# EAGLE board SparkFun_Photon_Weather_Shield_Panel_v10 (EAGLE 7.3.0), part 1 of 2
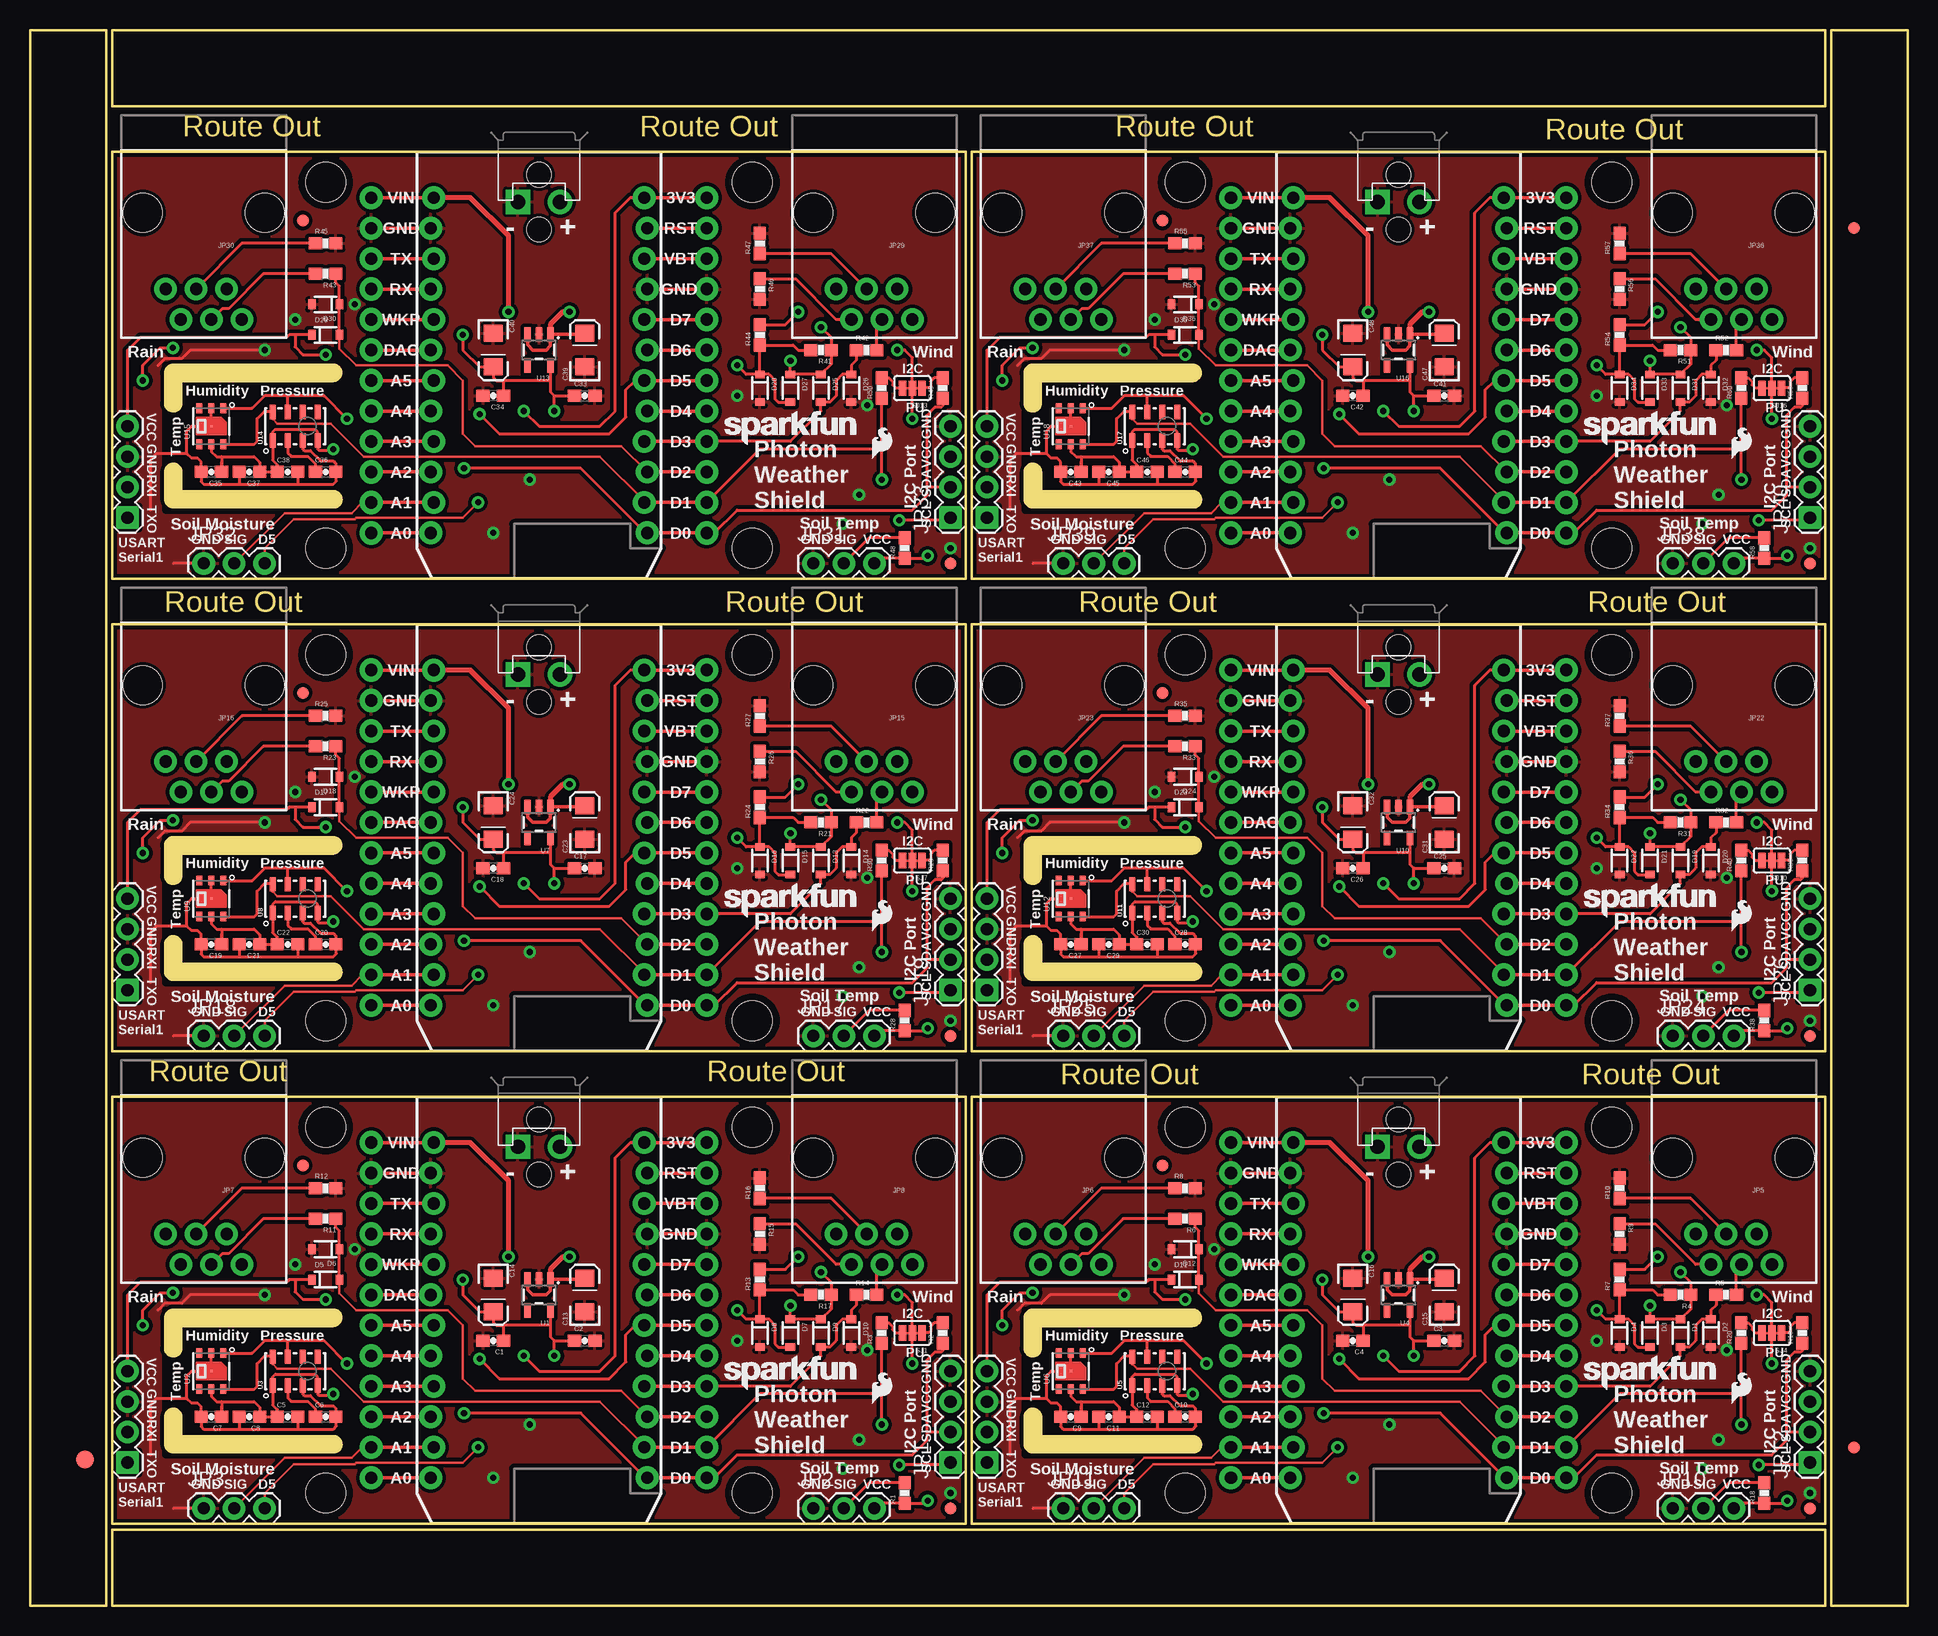
[diagram p0: board, top side]
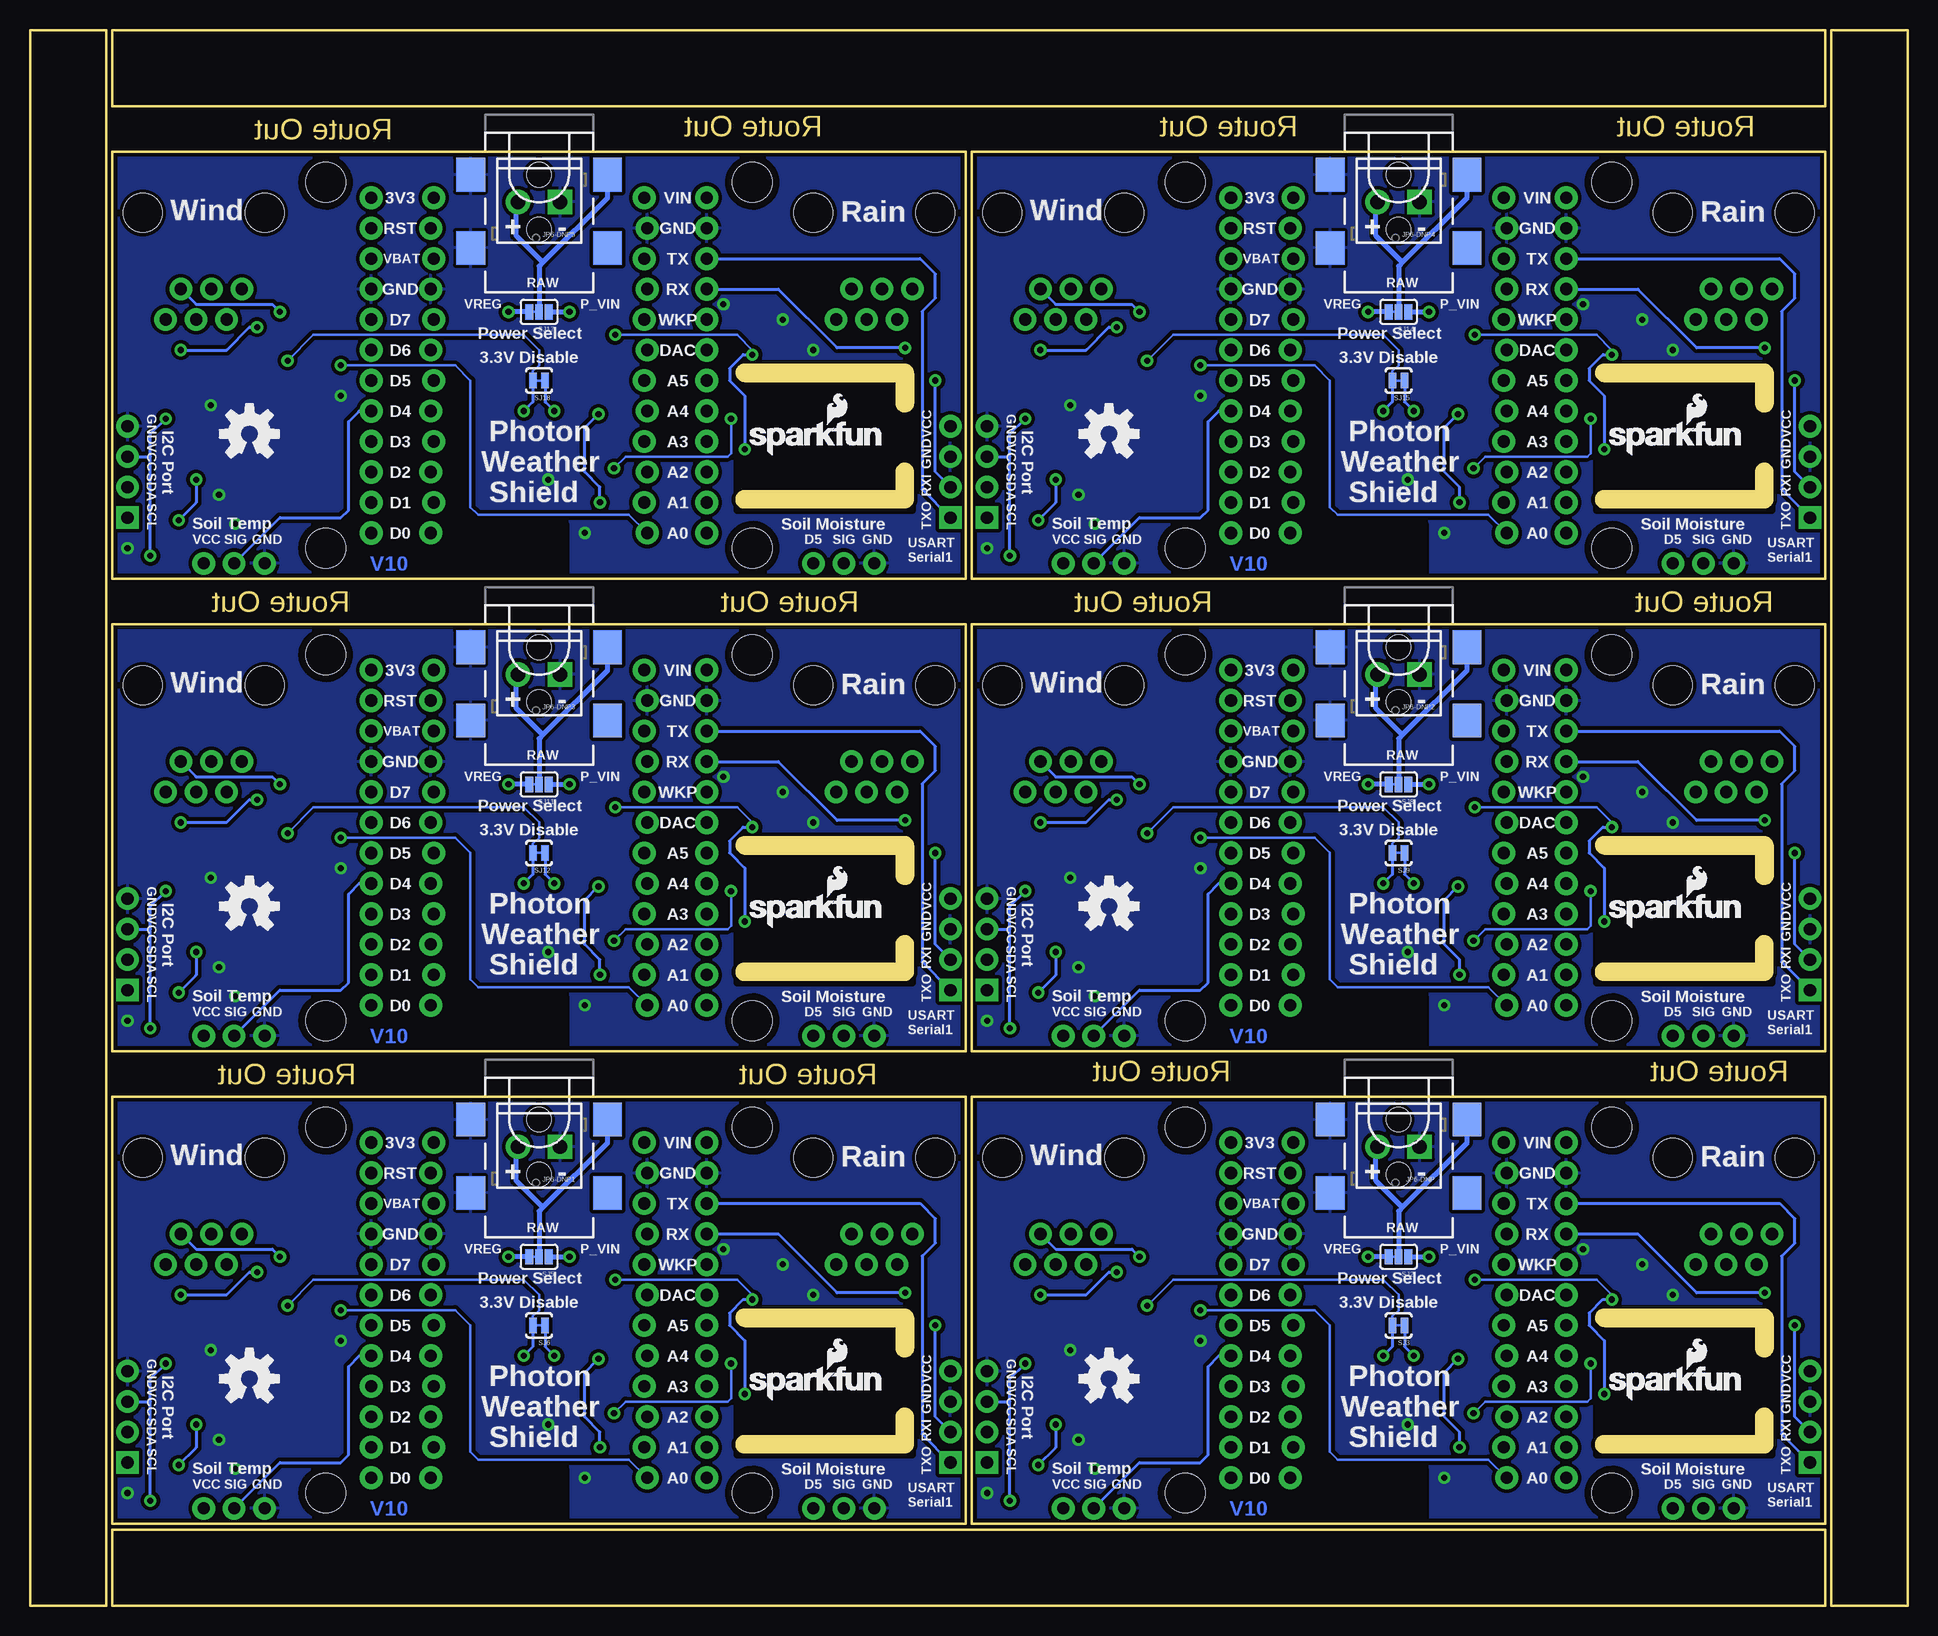
[diagram p1: board, bottom side, seen from below]

Size 156.46 x 131.32 mm. Coordinates in mm from the lower left corner, seen from the top.
Outline: 6.86,6.86 6.86,42.42 77.98,42.42 77.98,6.86 6.86,6.86
Outline: 11.25,23.95 11.25,21.49 arc90 11.94,20.8 arc90 12.6,21.46 12.6,23.32 25.22,23.32 arc90 25.93,24.03 arc90 25.3,24.66 11.96,24.66 arc90 11.25,23.95
Outline: 11.28,13.51 11.28,15.72 arc-90 11.96,16.41 arc-90 12.62,15.72 12.62,14.15 25.25,14.15 arc-90 25.96,13.44 arc-90 25.32,12.8 11.99,12.8 arc-90 11.28,13.51
Outline: 78.49,6.86 78.49,42.42 149.61,42.42 149.61,6.86 78.49,6.86
Outline: 82.88,23.95 82.88,21.49 arc90 83.57,20.8 arc90 84.23,21.46 84.23,23.32 96.85,23.32 arc90 97.56,24.03 arc90 96.93,24.66 83.59,24.66 arc90 82.88,23.95
Outline: 82.91,13.51 82.91,15.72 arc-90 83.59,16.41 arc-90 84.25,15.72 84.25,14.15 96.88,14.15 arc-90 97.59,13.44 arc-90 96.95,12.8 83.62,12.8 arc-90 82.91,13.51
Outline: 6.86,46.23 6.86,81.79 77.98,81.79 77.98,46.23 6.86,46.23
Outline: 11.25,63.32 11.25,60.86 arc90 11.94,60.17 arc90 12.6,60.83 12.6,62.69 25.22,62.69 arc90 25.93,63.4 arc90 25.3,64.03 11.96,64.03 arc90 11.25,63.32
Outline: 11.28,52.88 11.28,55.09 arc-90 11.96,55.78 arc-90 12.62,55.09 12.62,53.52 25.25,53.52 arc-90 25.96,52.81 arc-90 25.32,52.17 11.99,52.17 arc-90 11.28,52.88
Outline: 78.49,46.23 78.49,81.79 149.61,81.79 149.61,46.23 78.49,46.23
Outline: 82.88,63.32 82.88,60.86 arc90 83.57,60.17 arc90 84.23,60.83 84.23,62.69 96.85,62.69 arc90 97.56,63.4 arc90 96.93,64.03 83.59,64.03 arc90 82.88,63.32
Outline: 82.91,52.88 82.91,55.09 arc-90 83.59,55.78 arc-90 84.25,55.09 84.25,53.52 96.88,53.52 arc-90 97.59,52.81 arc-90 96.95,52.17 83.62,52.17 arc-90 82.91,52.88
Outline: 6.86,85.6 6.86,121.16 77.98,121.16 77.98,85.6 6.86,85.6
Outline: 11.25,102.69 11.25,100.23 arc90 11.94,99.54 arc90 12.6,100.2 12.6,102.06 25.22,102.06 arc90 25.93,102.77 arc90 25.3,103.4 11.96,103.4 arc90 11.25,102.69
Outline: 11.28,92.25 11.28,94.46 arc-90 11.96,95.15 arc-90 12.62,94.46 12.62,92.89 25.25,92.89 arc-90 25.96,92.18 arc-90 25.32,91.54 11.99,91.54 arc-90 11.28,92.25
Outline: 78.49,85.6 78.49,121.16 149.61,121.16 149.61,85.6 78.49,85.6
Outline: 82.88,102.69 82.88,100.23 arc90 83.57,99.54 arc90 84.23,100.2 84.23,102.06 96.85,102.06 arc90 97.56,102.77 arc90 96.93,103.4 83.59,103.4 arc90 82.88,102.69
Outline: 82.91,92.25 82.91,94.46 arc-90 83.59,95.15 arc-90 84.25,94.46 84.25,92.89 96.88,92.89 arc-90 97.59,92.18 arc-90 96.95,91.54 83.62,91.54 arc-90 82.91,92.25
Outline: 6.86,124.97 149.61,124.97 149.61,131.32 6.86,131.32 6.86,124.97
Outline: 150.11,131.32 150.11,0 156.46,0 156.46,131.32 150.11,131.32
Outline: 149.61,6.35 6.86,6.35 6.86,0 149.61,0 149.61,6.35
Outline: 6.35,0 6.35,131.32 0,131.32 0,0 6.35,0
Copper layers (1*16): Top 0.035mm / dielectric 1.5mm / Bottom 0.035mm
Design rules "SparkFun-2-layer": minimum track width 7mil, minimum drill 15mil, track to track 8mil, track to pad 8mil, pad to pad 8mil, via to via 8mil, smd to smd 8mil, copper to edge 8mil, drill to drill 8mil, minimum pad ring 12mil, minimum via ring 10mil, stop-mask expansion 4mil, vias tented up to drill 20mil, thermal gap 10mil
Net classes: 0 Default: width 0.203 mm; 1 vcc: width 0.203 mm
tRestrict: area 11.3,12.6 to 25.9,24.6; area 82.9,12.6 to 97.5,24.6; area 11.3,51.9 to 25.9,64; area 82.9,51.9 to 97.5,64; area 11.3,91.3 to 25.9,103.4; area 82.9,91.3 to 97.5,103.4
bRestrict: area 11.3,12.6 to 25.9,24.6; area 82.9,12.6 to 97.5,24.6; area 11.3,51.9 to 25.9,64; area 82.9,51.9 to 97.5,64; area 11.3,91.3 to 25.9,103.4; area 82.9,91.3 to 97.5,103.4
Milling: 24 lines

## Footprints (pad centres in the part's own frame; a part is rotated, then mirrored left to right if it is on the bottom)
0603-CAP = smd 1.1 x 1: 1 -0.85,0; 2 0.85,0
EIA3216 = smd 1.4 x 1.6: A 1.4,0; C -1.4,0
SOD-323 = smd 0.63 x 0.83: A 1.15,0; C -1.15,0
FIDUCIAL-1.5X3 = smd 1.5 x 1.5: 1 0,0
FIDUCIAL-1X2 = smd 1 x 1: 1 0,0
1X04 = drill 1.016 pad 1.88 square: 1 0,0 | drill 1.016 pad 1.88: 2 2.54,0; 3 5.08,0; 4 7.62,0
1X03 = drill 1.016 pad 1.88: 1 0,0; 2 2.54,0; 3 5.08,0
RJ11-6 = drill 1.016 pad 1.88: 1 -3.175,8.89; 2 -1.905,6.35; 3 -0.635,8.89; 4 0.635,6.35; 5 1.905,8.89; 6 3.175,6.35 | hole 3.251: -5.08,0; 5.08,0
POWER_JACK_SMD = smd 2.8 x 2.4: GND 0,-5.7; P$4 6.1,-5.7; VIN0 0,5.7; VIN1 6.1,5.7 | hole 2.032: 0,0; 4.572,0
SCREWTERMINAL-3.5MM-2 = drill 1.2 pad 2.032 square: 1 0,0 | drill 1.2 pad 2.032: 2 3.5,0
SPARK_PHOTON_TEMPLATE_WIDE_LOCKING = drill 1.016 pad 1.905: 1 1.397,31.75; 2 1.143,29.21; 3 1.397,26.67; 4 1.143,24.13; 5 1.397,21.59; 6 1.143,19.05; 7 1.397,16.51; 8 1.143,13.97; 9 1.397,11.43; 10 1.143,8.89; 11 1.397,6.35; 12 1.143,3.81; 13 19.177,3.81; 14 18.923,6.35; 15 19.177,8.89; 16 18.923,11.43; 17 19.177,13.97; 18 18.923,16.51; 19 19.177,19.05; 20 18.923,21.59; 21 19.177,24.13; 22 18.923,26.67; 23 19.177,29.21; 24 18.923,31.75 | drill 1.016 pad 1.93: 3V3 24.13,31.75; A0 -3.81,3.81; A1 -3.81,6.35; A2 -3.81,8.89; A3 -3.81,11.43; A4 -3.81,13.97; A5 -3.81,16.51; D0 24.13,3.81; D1 24.13,6.35; D2 24.13,8.89; D3 24.13,11.43; D4 24.13,13.97; D5 24.13,16.51; D6 24.13,19.05; D7 24.13,21.59; DAC -3.81,19.05; GND@0 -3.81,29.21; GND@2 24.13,24.13; RST 24.13,29.21; RX -3.81,24.13; TX -3.81,26.67; VBAT 24.13,26.67; VIN -3.81,31.75; WKP -3.81,21.59 | hole 3.302: -7.62,33.02; 27.94,33.02; -7.62,2.54; 27.94,2.54
0603-RES = smd 1.1 x 1: 1 -0.85,0; 2 0.85,0
PAD-JUMPER-3-3OF3_NC_BY_TRACE_YES_SILK_FULL_BOX = smd 0.635 x 1.27: 1 -0.813,0; 2 0,0; 3 0.813,0
PAD-JUMPER-3-2OF3_NC_BY_TRACE_YES_SILK_FULL_BOX = smd 0.635 x 1.27: 1 -0.813,0; 2 0,0; 3 0.813,0
PAD-JUMPER-2-NC_BY_TRACE_YES_SILK = smd 0.635 x 1.27: 1 -0.508,0; 2 0.508,0
SOT23-5 = smd 0.55 x 1.2: 1 -0.95,-1.3; 2 0,-1.3; 3 0.95,-1.3; 4 0.95,1.3; 5 -0.95,1.3
HTU21D = smd 0.2 x 0.2: 7 0,0 | smd 0.8 x 0.5: DATA 1.5,-1; GND 1.5,0; NC@1 -1.5,1; NC@6 1.5,1; SCK -1.5,-1; VDD -1.5,0
LGA8 = smd 1.2 x 0.5: 1 -1.2,1.875; 2 -1.2,0.625; 3 -1.2,-0.625; 4 -1.2,-1.875; 5 1.2,-1.875; 6 1.2,-0.625; 7 1.2,0.625; 8 1.2,1.875

## Placement (x,y rotation side)
C1  1.0uF  [0603-CAP]  38.61,22.1 180 top
C2  0.1uF  [0603-CAP]  46.23,22.1 0 top
C3  0.1uF  [0603-CAP]  117.86,22.1 0 top
C4  1.0uF  [0603-CAP]  110.24,22.1 180 top
C5  0.1uF  [0603-CAP]  21.46,15.75 0 top
C6  0.1uF  [0603-CAP]  24.64,15.75 0 top
C7  0.1uF  [0603-CAP]  15.11,15.75 180 top
C8  1.0uF  [0603-CAP]  18.29,15.75 180 top
C9  0.1uF  [0603-CAP]  86.74,15.75 180 top
C10  0.1uF  [0603-CAP]  96.27,15.75 0 top
C11  1.0uF  [0603-CAP]  89.92,15.75 180 top
C12  0.1uF  [0603-CAP]  93.09,15.75 0 top
C13  10uF  [EIA3216]  46.23,25.91 90 top
C14  10uF  [EIA3216]  38.61,25.91 270 top
C15  10uF  [EIA3216]  117.86,25.91 90 top
C16  10uF  [EIA3216]  110.24,25.91 270 top
C17  0.1uF  [0603-CAP]  46.23,61.47 0 top
C18  1.0uF  [0603-CAP]  38.61,61.47 180 top
C19  0.1uF  [0603-CAP]  15.11,55.12 180 top
C20  0.1uF  [0603-CAP]  24.64,55.12 0 top
C21  1.0uF  [0603-CAP]  18.29,55.12 180 top
C22  0.1uF  [0603-CAP]  21.46,55.12 0 top
C23  10uF  [EIA3216]  46.23,65.28 90 top
C24  10uF  [EIA3216]  38.61,65.28 270 top
C25  0.1uF  [0603-CAP]  117.86,61.47 0 top
C26  1.0uF  [0603-CAP]  110.24,61.47 180 top
C27  0.1uF  [0603-CAP]  86.74,55.12 180 top
C28  0.1uF  [0603-CAP]  96.27,55.12 0 top
C29  1.0uF  [0603-CAP]  89.92,55.12 180 top
C30  0.1uF  [0603-CAP]  93.09,55.12 0 top
C31  10uF  [EIA3216]  117.86,65.28 90 top
C32  10uF  [EIA3216]  110.24,65.28 270 top
C33  0.1uF  [0603-CAP]  46.23,100.84 0 top
C34  1.0uF  [0603-CAP]  38.61,100.84 180 top
C35  0.1uF  [0603-CAP]  15.11,94.49 180 top
C36  0.1uF  [0603-CAP]  24.64,94.49 0 top
C37  1.0uF  [0603-CAP]  18.29,94.49 180 top
C38  0.1uF  [0603-CAP]  21.46,94.49 0 top
C39  10uF  [EIA3216]  46.23,104.65 90 top
C40  10uF  [EIA3216]  38.61,104.65 270 top
C41  0.1uF  [0603-CAP]  117.86,100.84 0 top
C42  1.0uF  [0603-CAP]  110.24,100.84 180 top
C43  0.1uF  [0603-CAP]  86.74,94.49 180 top
C44  0.1uF  [0603-CAP]  96.27,94.49 0 top
C45  1.0uF  [0603-CAP]  89.92,94.49 180 top
C46  0.1uF  [0603-CAP]  93.09,94.49 0 top
C47  10uF  [EIA3216]  117.86,104.65 90 top
C48  10uF  [EIA3216]  110.24,104.65 270 top
D1  250mA/100V  [SOD-323]  137.54,22.73 270 top
D2  250mA/100V  [SOD-323]  140.08,22.73 270 top
D3  250mA/100V  [SOD-323]  135,22.73 270 top
D4  250mA/100V  [SOD-323]  132.46,22.73 270 top
D5  250mA/100V  [SOD-323]  24.64,27.18 0 top
D6  250mA/100V  [SOD-323]  24.64,29.72 180 top
D7  250mA/100V  [SOD-323]  63.37,22.73 270 top
D8  250mA/100V  [SOD-323]  60.83,22.73 270 top
D9  250mA/100V  [SOD-323]  65.91,22.73 270 top
D10  250mA/100V  [SOD-323]  68.45,22.73 270 top
D11  250mA/100V  [SOD-323]  96.27,27.18 0 top
D12  250mA/100V  [SOD-323]  96.27,29.72 180 top
D13  250mA/100V  [SOD-323]  65.91,62.1 270 top
D14  250mA/100V  [SOD-323]  68.45,62.1 270 top
D15  250mA/100V  [SOD-323]  63.37,62.1 270 top
D16  250mA/100V  [SOD-323]  60.83,62.1 270 top
D17  250mA/100V  [SOD-323]  24.64,66.55 0 top
D18  250mA/100V  [SOD-323]  24.64,69.09 180 top
D19  250mA/100V  [SOD-323]  137.54,62.1 270 top
D20  250mA/100V  [SOD-323]  140.08,62.1 270 top
D21  250mA/100V  [SOD-323]  135,62.1 270 top
D22  250mA/100V  [SOD-323]  132.46,62.1 270 top
D23  250mA/100V  [SOD-323]  96.27,66.55 0 top
D24  250mA/100V  [SOD-323]  96.27,69.09 180 top
D25  250mA/100V  [SOD-323]  65.91,101.47 270 top
D26  250mA/100V  [SOD-323]  68.45,101.47 270 top
D27  250mA/100V  [SOD-323]  63.37,101.47 270 top
D28  250mA/100V  [SOD-323]  60.83,101.47 270 top
D29  250mA/100V  [SOD-323]  24.64,105.92 0 top
D30  250mA/100V  [SOD-323]  24.64,108.46 180 top
D31  250mA/100V  [SOD-323]  137.54,101.47 270 top
D32  250mA/100V  [SOD-323]  140.08,101.47 270 top
D33  250mA/100V  [SOD-323]  135,101.47 270 top
D34  250mA/100V  [SOD-323]  132.46,101.47 270 top
D35  250mA/100V  [SOD-323]  96.27,105.92 0 top
D36  250mA/100V  [SOD-323]  96.27,108.46 180 top
E$1  [FIDUCIAL-1.5X3]  4.57,12.19 0 top
E$3  [FIDUCIAL-1X2]  152.02,114.81 180 top
E$4  [FIDUCIAL-1X2]  152.02,13.21 0 top
FID1  FIDUCIAL1X2  [FIDUCIAL-1X2]  76.71,8.13 0 top
FID2  FIDUCIAL1X2  [FIDUCIAL-1X2]  22.73,36.7 0 top
FID3  FIDUCIAL1X2  [FIDUCIAL-1X2]  148.34,8.13 0 top
FID4  FIDUCIAL1X2  [FIDUCIAL-1X2]  94.36,36.7 0 top
FID5  FIDUCIAL1X2  [FIDUCIAL-1X2]  76.71,47.5 0 top
FID6  FIDUCIAL1X2  [FIDUCIAL-1X2]  22.73,76.07 0 top
FID7  FIDUCIAL1X2  [FIDUCIAL-1X2]  148.34,47.5 0 top
FID8  FIDUCIAL1X2  [FIDUCIAL-1X2]  94.36,76.07 0 top
FID9  FIDUCIAL1X2  [FIDUCIAL-1X2]  76.71,86.87 0 top
FID10  FIDUCIAL1X2  [FIDUCIAL-1X2]  22.73,115.44 0 top
FID11  FIDUCIAL1X2  [FIDUCIAL-1X2]  148.34,86.87 0 top
FID12  FIDUCIAL1X2  [FIDUCIAL-1X2]  94.36,115.44 0 top
JP1  I2C Port  [1X04]  76.71,11.94 90 top
JP2  Soil/Water Temp  [1X03]  65.28,8.13 0 top
JP3  Soil Moisture  [1X03]  14.48,8.13 0 top
JP4  Serial1 Port  [1X04]  8.13,11.94 90 top
JP5  RJ11  [RJ11-6]  141.99,37.34 180 top
JP5-DNP  5.5x2.1mm Barrel  [POWER_JACK_SMD]  42.42,40.51 270 bottom
JP5-DNP1  5.5x2.1mm Barrel  [POWER_JACK_SMD]  114.05,40.51 270 bottom
JP5-DNP2  5.5x2.1mm Barrel  [POWER_JACK_SMD]  42.42,79.88 270 bottom
JP5-DNP3  5.5x2.1mm Barrel  [POWER_JACK_SMD]  114.05,79.88 270 bottom
JP5-DNP4  5.5x2.1mm Barrel  [POWER_JACK_SMD]  42.42,119.25 270 bottom
JP5-DNP5  5.5x2.1mm Barrel  [POWER_JACK_SMD]  114.05,119.25 270 bottom
JP6  RJ11  [RJ11-6]  86.11,37.34 180 top
JP6-DNP  [SCREWTERMINAL-3.5MM-2]  40.67,38.25 180 bottom
JP6-DNP1  [SCREWTERMINAL-3.5MM-2]  112.29,38.25 180 bottom
JP6-DNP2  [SCREWTERMINAL-3.5MM-2]  40.67,77.62 180 bottom
JP6-DNP3  [SCREWTERMINAL-3.5MM-2]  112.29,77.62 180 bottom
JP6-DNP4  [SCREWTERMINAL-3.5MM-2]  40.67,116.99 180 bottom
JP6-DNP5  [SCREWTERMINAL-3.5MM-2]  112.29,116.99 180 bottom
JP7  RJ11  [RJ11-6]  14.48,37.34 180 top
JP8  RJ11  [RJ11-6]  70.36,37.34 180 top
JP9  PHOTON_TEMPLATE_WIDE_LOCKING  [SPARK_PHOTON_TEMPLATE_WIDE_LOCKING]  32.26,6.86 0 top
JP10  Soil/Water Temp  [1X03]  136.91,8.13 0 top
JP11  Soil Moisture  [1X03]  86.11,8.13 0 top
JP12  I2C Port  [1X04]  148.34,11.94 90 top
JP13  Serial1 Port  [1X04]  79.76,11.94 90 top
JP14  PHOTON_TEMPLATE_WIDE_LOCKING  [SPARK_PHOTON_TEMPLATE_WIDE_LOCKING]  103.89,6.86 0 top
JP15  RJ11  [RJ11-6]  70.36,76.71 180 top
JP16  RJ11  [RJ11-6]  14.48,76.71 180 top
JP17  Soil/Water Temp  [1X03]  65.28,47.5 0 top
JP18  Soil Moisture  [1X03]  14.48,47.5 0 top
JP19  I2C Port  [1X04]  76.71,51.31 90 top
JP20  Serial1 Port  [1X04]  8.13,51.31 90 top
JP21  PHOTON_TEMPLATE_WIDE_LOCKING  [SPARK_PHOTON_TEMPLATE_WIDE_LOCKING]  32.26,46.23 0 top
JP22  RJ11  [RJ11-6]  141.99,76.71 180 top
JP23  RJ11  [RJ11-6]  86.11,76.71 180 top
JP24  Soil/Water Temp  [1X03]  136.91,47.5 0 top
JP25  Soil Moisture  [1X03]  86.11,47.5 0 top
JP26  I2C Port  [1X04]  148.34,51.31 90 top
JP27  Serial1 Port  [1X04]  79.76,51.31 90 top
JP28  PHOTON_TEMPLATE_WIDE_LOCKING  [SPARK_PHOTON_TEMPLATE_WIDE_LOCKING]  103.89,46.23 0 top
JP29  RJ11  [RJ11-6]  70.36,116.08 180 top
JP30  RJ11  [RJ11-6]  14.48,116.08 180 top
JP31  Soil/Water Temp  [1X03]  65.28,86.87 0 top
JP32  Soil Moisture  [1X03]  14.48,86.87 0 top
JP33  I2C Port  [1X04]  76.71,90.68 90 top
JP34  Serial1 Port  [1X04]  8.13,90.68 90 top
JP35  PHOTON_TEMPLATE_WIDE_LOCKING  [SPARK_PHOTON_TEMPLATE_WIDE_LOCKING]  32.26,85.6 0 top
JP36  RJ11  [RJ11-6]  141.99,116.08 180 top
JP37  RJ11  [RJ11-6]  86.11,116.08 180 top
JP38  Soil/Water Temp  [1X03]  136.91,86.87 0 top
JP39  Soil Moisture  [1X03]  86.11,86.87 0 top
JP40  I2C Port  [1X04]  148.34,90.68 90 top
JP41  Serial1 Port  [1X04]  79.76,90.68 90 top
JP42  PHOTON_TEMPLATE_WIDE_LOCKING  [SPARK_PHOTON_TEMPLATE_WIDE_LOCKING]  103.89,85.6 0 top
LOGO1  OSHW-LOGOM  [OSHW-LOGO-M]  66.55,18.92 0 bottom
LOGO2  SFE_LOGO_NAME.1_INCH  [SFE_LOGO_NAME_.1]  57.4,17.53 0 top
LOGO3  OSHW-LOGOM  [OSHW-LOGO-M]  138.18,18.92 0 bottom
LOGO4  SFE_LOGO_NAME.1_INCH  [SFE_LOGO_NAME_.1]  129.03,17.53 0 top
LOGO5  OSHW-LOGOM  [OSHW-LOGO-M]  66.55,58.29 0 bottom
LOGO6  SFE_LOGO_NAME.1_INCH  [SFE_LOGO_NAME_.1]  57.4,56.9 0 top
LOGO7  OSHW-LOGOM  [OSHW-LOGO-M]  138.18,58.29 0 bottom
LOGO8  SFE_LOGO_NAME.1_INCH  [SFE_LOGO_NAME_.1]  129.03,56.9 0 top
LOGO9  OSHW-LOGOM  [OSHW-LOGO-M]  66.55,97.66 0 bottom
LOGO10  SFE_LOGO_NAME.1_INCH  [SFE_LOGO_NAME_.1]  57.4,96.27 0 top
LOGO11  OSHW-LOGOM  [OSHW-LOGO-M]  138.18,97.66 0 bottom
LOGO12  SFE_LOGO_NAME.1_INCH  [SFE_LOGO_NAME_.1]  129.03,96.27 0 top
R1  4.7K  [0603-RES]  72.9,9.4 90 top
R2  10K  [0603-RES]  76.07,22.73 90 top
R3  10K  [0603-RES]  70.99,22.73 90 top
R4  4.7K  [0603-RES]  137.54,25.91 180 top
R5  1K  [0603-RES]  141.35,25.91 0 top
R6  1K  [0603-RES]  96.27,32.26 180 top
R7  1K  [0603-RES]  132.46,27.18 90 top
R8  1K  [0603-RES]  96.27,34.8 0 top
R9  1K  [0603-RES]  132.46,30.99 270 top
R10  1K  [0603-RES]  132.46,34.8 90 top
R11  1K  [0603-RES]  24.64,32.26 180 top
R12  1K  [0603-RES]  24.64,34.8 0 top
R13  1K  [0603-RES]  60.83,27.18 90 top
R14  1K  [0603-RES]  69.72,25.91 0 top
R15  1K  [0603-RES]  60.83,30.99 270 top
R16  1K  [0603-RES]  60.83,34.8 90 top
R17  4.7K  [0603-RES]  65.91,25.91 180 top
R18  4.7K  [0603-RES]  144.53,9.4 90 top
R19  10K  [0603-RES]  147.7,22.73 90 top
R20  10K  [0603-RES]  142.62,22.73 90 top
R21  4.7K  [0603-RES]  65.91,65.28 180 top
R22  1K  [0603-RES]  69.72,65.28 0 top
R23  1K  [0603-RES]  24.64,71.63 180 top
R24  1K  [0603-RES]  60.83,66.55 90 top
R25  1K  [0603-RES]  24.64,74.17 0 top
R26  1K  [0603-RES]  60.83,70.36 270 top
R27  1K  [0603-RES]  60.83,74.17 90 top
R28  4.7K  [0603-RES]  72.9,48.77 90 top
R29  10K  [0603-RES]  76.07,62.1 90 top
R30  10K  [0603-RES]  70.99,62.1 90 top
R31  4.7K  [0603-RES]  137.54,65.28 180 top
R32  1K  [0603-RES]  141.35,65.28 0 top
R33  1K  [0603-RES]  96.27,71.63 180 top
R34  1K  [0603-RES]  132.46,66.55 90 top
R35  1K  [0603-RES]  96.27,74.17 0 top
R36  1K  [0603-RES]  132.46,70.36 270 top
R37  1K  [0603-RES]  132.46,74.17 90 top
R38  4.7K  [0603-RES]  144.53,48.77 90 top
R39  10K  [0603-RES]  147.7,62.1 90 top
R40  10K  [0603-RES]  142.62,62.1 90 top
R41  4.7K  [0603-RES]  65.91,104.65 180 top
R42  1K  [0603-RES]  69.72,104.65 0 top
R43  1K  [0603-RES]  24.64,111 180 top
R44  1K  [0603-RES]  60.83,105.92 90 top
R45  1K  [0603-RES]  24.64,113.54 0 top
R46  1K  [0603-RES]  60.83,109.73 270 top
R47  1K  [0603-RES]  60.83,113.54 90 top
R48  4.7K  [0603-RES]  72.9,88.14 90 top
R49  10K  [0603-RES]  76.07,101.47 90 top
R50  10K  [0603-RES]  70.99,101.47 90 top
R51  4.7K  [0603-RES]  137.54,104.65 180 top
R52  1K  [0603-RES]  141.35,104.65 0 top
R53  1K  [0603-RES]  96.27,111 180 top
R54  1K  [0603-RES]  132.46,105.92 90 top
R55  1K  [0603-RES]  96.27,113.54 0 top
R56  1K  [0603-RES]  132.46,109.73 270 top
R57  1K  [0603-RES]  132.46,113.54 90 top
R58  4.7K  [0603-RES]  144.53,88.14 90 top
R59  10K  [0603-RES]  147.7,101.47 90 top
R60  10K  [0603-RES]  142.62,101.47 90 top
SJ1  [PAD-JUMPER-3-3OF3_NC_BY_TRACE_YES_SILK_FULL_BOX]  73.53,22.73 180 top
SJ2  [PAD-JUMPER-3-2OF3_NC_BY_TRACE_YES_SILK_FULL_BOX]  42.42,29.08 180 bottom
SJ3  [PAD-JUMPER-2-NC_BY_TRACE_YES_SILK]  42.42,23.37 180 bottom
SJ4  [PAD-JUMPER-3-3OF3_NC_BY_TRACE_YES_SILK_FULL_BOX]  145.16,22.73 180 top
SJ5  [PAD-JUMPER-3-2OF3_NC_BY_TRACE_YES_SILK_FULL_BOX]  114.05,29.08 180 bottom
SJ6  [PAD-JUMPER-2-NC_BY_TRACE_YES_SILK]  114.05,23.37 180 bottom
SJ7  [PAD-JUMPER-3-3OF3_NC_BY_TRACE_YES_SILK_FULL_BOX]  73.53,62.1 180 top
SJ8  [PAD-JUMPER-3-2OF3_NC_BY_TRACE_YES_SILK_FULL_BOX]  42.42,68.45 180 bottom
SJ9  [PAD-JUMPER-2-NC_BY_TRACE_YES_SILK]  42.42,62.74 180 bottom
SJ10  [PAD-JUMPER-3-3OF3_NC_BY_TRACE_YES_SILK_FULL_BOX]  145.16,62.1 180 top
SJ11  [PAD-JUMPER-3-2OF3_NC_BY_TRACE_YES_SILK_FULL_BOX]  114.05,68.45 180 bottom
SJ12  [PAD-JUMPER-2-NC_BY_TRACE_YES_SILK]  114.05,62.74 180 bottom
SJ13  [PAD-JUMPER-3-3OF3_NC_BY_TRACE_YES_SILK_FULL_BOX]  73.53,101.47 180 top
SJ14  [PAD-JUMPER-3-2OF3_NC_BY_TRACE_YES_SILK_FULL_BOX]  42.42,107.82 180 bottom
SJ15  [PAD-JUMPER-2-NC_BY_TRACE_YES_SILK]  42.42,102.11 180 bottom
SJ16  [PAD-JUMPER-3-3OF3_NC_BY_TRACE_YES_SILK_FULL_BOX]  145.16,101.47 180 top
SJ17  [PAD-JUMPER-3-2OF3_NC_BY_TRACE_YES_SILK_FULL_BOX]  114.05,107.82 180 bottom
SJ18  [PAD-JUMPER-2-NC_BY_TRACE_YES_SILK]  114.05,102.11 180 bottom
U1  3.3V MIC5219  [SOT23-5]  42.42,25.91 180 top
U2  HTU21D  [HTU21D]  15.11,19.56 90 top
U3  MPL3115A2LGA8  [LGA8]  22.1,19.56 90 top
U4  3.3V MIC5219  [SOT23-5]  114.05,25.91 180 top
U5  MPL3115A2LGA8  [LGA8]  93.73,19.56 90 top
U6  HTU21D  [HTU21D]  86.74,19.56 90 top
U7  3.3V MIC5219  [SOT23-5]  42.42,65.28 180 top
U8  MPL3115A2LGA8  [LGA8]  22.1,58.93 90 top
U9  HTU21D  [HTU21D]  15.11,58.93 90 top
U10  3.3V MIC5219  [SOT23-5]  114.05,65.28 180 top
U11  MPL3115A2LGA8  [LGA8]  93.73,58.93 90 top
U12  HTU21D  [HTU21D]  86.74,58.93 90 top
U13  3.3V MIC5219  [SOT23-5]  42.42,104.65 180 top
U14  MPL3115A2LGA8  [LGA8]  22.1,98.3 90 top
U15  HTU21D  [HTU21D]  15.11,98.3 90 top
U16  3.3V MIC5219  [SOT23-5]  114.05,104.65 180 top
U17  MPL3115A2LGA8  [LGA8]  93.73,98.3 90 top
U18  HTU21D  [HTU21D]  86.74,98.3 90 top
U$1  [SFE_LOGO_NAME_FLAME_.1]  25.27,17.04 0 bottom
U$2  [SFE_LOGO_NAME_FLAME_.1]  96.9,17.04 0 bottom
U$3  [SFE_LOGO_FLAME_.1]  69.85,16.51 0 top
U$4  [SFE_LOGO_FLAME_.1]  141.48,16.51 0 top
U$5  [SFE_LOGO_NAME_FLAME_.1]  25.27,56.41 0 bottom
U$6  [SFE_LOGO_FLAME_.1]  69.85,55.88 0 top
U$7  [SFE_LOGO_NAME_FLAME_.1]  96.9,56.41 0 bottom
U$8  [SFE_LOGO_FLAME_.1]  141.48,55.88 0 top
U$9  [SFE_LOGO_NAME_FLAME_.1]  25.27,95.78 0 bottom
U$10  [SFE_LOGO_FLAME_.1]  69.85,95.25 0 top
U$11  [SFE_LOGO_NAME_FLAME_.1]  96.9,95.78 0 bottom
U$12  [SFE_LOGO_FLAME_.1]  141.48,95.25 0 top

## Library data of the parts
C1 C4 C8 C11 C18 C21 C26 C29 C34 C37 C42 C45 = SparkFun-Capacitors; PROD_ID: CAP-00868
C2 C3 C5-C7 C9 C10 C12 C17 C19 C20 C22 C25 C27 C28 C30 C33 C35 C36 C38 C41 C43 C44 C46 = SparkFun-Capacitors; PROD_ID: CAP-00810
C13-C16 C23 C24 C31 C32 C39 C40 C47 C48 = SparkFun-Capacitors; PROD_ID: CAP-00811
D1-D36 = SparkFun-DiscreteSemi; PROD_ID: DIO-09646
E$1 = SparkFun-Retired
E$3 E$4 FID1-FID12 LOGO1-LOGO12 U$1-U$12 = SparkFun-Aesthetics
JP1-JP4 JP10-JP13 JP17-JP20 JP24-JP27 JP31-JP34 JP38-JP41 = SparkFun-Connectors
JP5-JP8 JP15 JP16 JP22 JP23 JP29 JP30 JP36 JP37 = SparkFun-Connectors; PROD_ID: CONN-08590
JP5-DNP JP5-DNP1-JP5-DNP5 = SparkFun-Connectors; PROD_ID: CONN-08106; SF_ID: PRT-12748
JP6-DNP JP6-DNP1-JP6-DNP5 = SparkFun-Connectors; PROD_ID: CONN-08399
JP9 JP14 JP21 JP28 JP35 JP42 = template_temp
R1 R4 R17 R18 R21 R28 R31 R38 R41 R48 R51 R58 = SparkFun-Resistors; PROD_ID: RES-07857
R2 R3 R19 R20 R29 R30 R39 R40 R49 R50 R59 R60 = SparkFun-Resistors; PROD_ID: RES-00824
R5-R16 R22-R27 R32-R37 R42-R47 R52-R57 = SparkFun-Resistors; PROD_ID: RES-07856
SJ1-SJ18 = SparkFun-Passives
U1 U4 U7 U10 U13 U16 = SparkFun-PowerIC; PROD_ID: VREG-00822
U2 U6 U9 U12 U15 U18 = SparkFun-Sensors; PROD_ID: IC-11793
U3 U5 U8 U11 U14 U17 = SparkFun-Sensors; PROD_ID: IC-10869

## Nets
3.3V: C1.1 C2.1 C5.1 C7.1 C8.1 C14.A D5.C D7.C D9.C JP1.3 JP2.3 JP4.4 R1.1 R17.1 SJ1.2 SJ3.2 U1.5 U2.VDD U3.1 U3.4
3.3V1: C3.1 C4.1 C9.1 C11.1 C12.1 C16.A D1.C D3.C D11.C JP10.3 JP12.3 JP13.4 R4.1 R18.1 SJ4.2 SJ6.2 U4.5 U5.1 U5.4 U6.VDD
3.3V2: C17.1 C18.1 C19.1 C21.1 C22.1 C24.A D13.C D15.C D17.C JP17.3 JP19.3 JP20.4 R21.1 R28.1 SJ7.2 SJ9.2 U7.5 U8.1 U8.4 U9.VDD
3.3V3: C25.1 C26.1 C27.1 C29.1 C30.1 C32.A D19.C D21.C D23.C JP24.3 JP26.3 JP27.4 R31.1 R38.1 SJ10.2 SJ12.2 U10.5 U11.1 U11.4 U12.VDD
3.3V4: C33.1 C34.1 C35.1 C37.1 C38.1 C40.A D25.C D27.C D29.C JP31.3 JP33.3 JP34.4 R41.1 R48.1 SJ13.2 SJ15.2 U13.5 U14.1 U14.4 U15.VDD
3.3V5: C41.1 C42.1 C43.1 C45.1 C46.1 C48.A D31.C D33.C D35.C JP38.3 JP40.3 JP41.4 R51.1 R58.1 SJ16.2 SJ18.2 U16.5 U17.1 U17.4 U18.VDD
GND: C1.2 C2.2 C5.2 C6.2 C7.2 C8.2 C13.C C14.C D6.A D8.A D10.A JP1.4 JP2.1 JP3.1 JP4.3 JP5-DNP.GND JP5-DNP.P$4 JP6-DNP.1 JP9.2 JP9.21 JP9.GND@0 JP9.GND@2 R12.2 R15.2 R16.2 U1.2 U2.7 U2.GND U3.3
GND1: C3.2 C4.2 C9.2 C10.2 C11.2 C12.2 C15.C C16.C D2.A D4.A D12.A JP5-DNP1.GND JP5-DNP1.P$4 JP6-DNP1.1 JP10.1 JP11.1 JP12.4 JP13.3 JP14.2 JP14.21 JP14.GND@0 JP14.GND@2 R8.2 R9.2 R10.2 U4.2 U5.3 U6.7 U6.GND
GND2: C17.2 C18.2 C19.2 C20.2 C21.2 C22.2 C23.C C24.C D14.A D16.A D18.A JP5-DNP2.GND JP5-DNP2.P$4 JP6-DNP2.1 JP17.1 JP18.1 JP19.4 JP20.3 JP21.2 JP21.21 JP21.GND@0 JP21.GND@2 R25.2 R26.2 R27.2 U7.2 U8.3 U9.7 U9.GND
GND3: C25.2 C26.2 C27.2 C28.2 C29.2 C30.2 C31.C C32.C D20.A D22.A D24.A JP5-DNP3.GND JP5-DNP3.P$4 JP6-DNP3.1 JP24.1 JP25.1 JP26.4 JP27.3 JP28.2 JP28.21 JP28.GND@0 JP28.GND@2 R35.2 R36.2 R37.2 U10.2 U11.3 U12.7 U12.GND
GND4: C33.2 C34.2 C35.2 C36.2 C37.2 C38.2 C39.C C40.C D26.A D28.A D30.A JP5-DNP4.GND JP5-DNP4.P$4 JP6-DNP4.1 JP31.1 JP32.1 JP33.4 JP34.3 JP35.2 JP35.21 JP35.GND@0 JP35.GND@2 R45.2 R46.2 R47.2 U13.2 U14.3 U15.7 U15.GND
GND5: C41.2 C42.2 C43.2 C44.2 C45.2 C46.2 C47.C C48.C D32.A D34.A D36.A JP5-DNP5.GND JP5-DNP5.P$4 JP6-DNP5.1 JP38.1 JP39.1 JP40.4 JP41.3 JP42.2 JP42.21 JP42.GND@0 JP42.GND@2 R55.2 R56.2 R57.2 U16.2 U17.3 U18.7 U18.GND
INT-PRESSURE: U3.6
INT-PRESSURE1: U5.6
INT-PRESSURE2: U8.6
INT-PRESSURE3: U11.6
INT-PRESSURE4: U14.6
INT-PRESSURE5: U17.6
N$1: JP8.3 R14.2
N$2: JP8.2 R13.2
N$3: R3.2 SJ1.3
N$4: JP7.3 R11.2
N$5: C6.1 U3.2
N$6: R2.2 SJ1.1
N$7: JP9.3V3 JP9.24 SJ3.1
N$8: C10.1 U5.2
N$9: JP5.2 R7.2
N$10: JP5.3 R5.2
N$11: JP7.4 R12.1
N$12: JP8.5 R15.1
N$13: JP8.4 R16.1
N$14: JP6.3 R6.2
N$15: JP6.4 R8.1
N$16: JP5.5 R9.1
N$17: JP5.4 R10.1
N$18: R20.2 SJ4.3
N$19: R19.2 SJ4.1
N$20: JP14.3V3 JP14.24 SJ6.1
N$21: C20.1 U8.2
N$22: JP15.2 R24.2
N$23: JP15.3 R22.2
N$24: JP16.3 R23.2
N$25: JP16.4 R25.1
N$26: JP15.5 R26.1
N$27: JP15.4 R27.1
N$28: R30.2 SJ7.3
N$29: R29.2 SJ7.1
N$30: JP21.3V3 JP21.24 SJ9.1
N$31: C28.1 U11.2
N$32: JP22.2 R34.2
N$33: JP22.3 R32.2
N$34: JP23.3 R33.2
N$35: JP23.4 R35.1
N$36: JP22.5 R36.1
N$37: JP22.4 R37.1
N$38: R40.2 SJ10.3
N$39: R39.2 SJ10.1
N$40: JP28.3V3 JP28.24 SJ12.1
N$41: C36.1 U14.2
N$42: JP29.2 R44.2
N$43: JP29.3 R42.2
N$44: JP30.3 R43.2
N$45: JP30.4 R45.1
N$46: JP29.5 R46.1
N$47: JP29.4 R47.1
N$48: R50.2 SJ13.3
N$49: R49.2 SJ13.1
N$50: JP35.3V3 JP35.24 SJ15.1
N$51: C44.1 U17.2
N$52: JP36.2 R54.2
N$53: JP36.3 R52.2
N$54: JP37.3 R53.2
N$55: JP37.4 R55.1
N$56: JP36.5 R56.1
N$57: JP36.4 R57.1
N$58: R60.2 SJ16.3
N$59: R59.2 SJ16.1
N$60: JP42.3V3 JP42.24 SJ18.1
PHOTON_VIN: JP9.1 JP9.VIN SJ2.1
PHOTON_VIN1: JP14.1 JP14.VIN SJ5.1
PHOTON_VIN2: JP21.1 JP21.VIN SJ8.1
PHOTON_VIN3: JP28.1 JP28.VIN SJ11.1
PHOTON_VIN4: JP35.1 JP35.VIN SJ14.1
PHOTON_VIN5: JP42.1 JP42.VIN SJ17.1
RAIN: D5.A D6.C JP9.15 JP9.D2 R11.1
RAIN1: D11.A D12.C JP14.15 JP14.D2 R6.1
RAIN2: JP7.2
RAIN3: JP6.2
RAIN4: JP6.5
RAIN5: JP7.5
RAIN6: D17.A D18.C JP21.15 JP21.D2 R23.1
RAIN7: JP16.2
RAIN8: JP16.5
RAIN9: D23.A D24.C JP28.15 JP28.D2 R33.1
RAIN10: JP23.2
RAIN11: JP23.5
RAIN12: D29.A D30.C JP35.15 JP35.D2 R43.1
RAIN13: JP30.2
RAIN14: JP30.5
RAIN15: D35.A D36.C JP42.15 JP42.D2 R53.1
RAIN16: JP37.2
RAIN17: JP37.5
RAW [vcc]: JP5-DNP.VIN0 JP6-DNP.2 SJ2.2
RAW1 [vcc]: JP5-DNP1.VIN0 JP6-DNP1.2 SJ5.2
RAW2 [vcc]: JP5-DNP2.VIN0 JP6-DNP2.2 SJ8.2
RAW3 [vcc]: JP5-DNP3.VIN0 JP6-DNP3.2 SJ11.2
RAW4 [vcc]: JP5-DNP4.VIN0 JP6-DNP4.2 SJ14.2
RAW5 [vcc]: JP5-DNP5.VIN0 JP6-DNP5.2 SJ17.2
RXI: JP4.2 JP9.4 JP9.RX
RXI1: JP13.2 JP14.4 JP14.RX
RXI2: JP20.2 JP21.4 JP21.RX
RXI3: JP27.2 JP28.4 JP28.RX
RXI4: JP34.2 JP35.4 JP35.RX
RXI5: JP41.2 JP42.4 JP42.RX
SCL: JP1.1 JP9.14 JP9.D1 R3.1 U2.SCK U3.8
SCL1: JP12.1 JP14.14 JP14.D1 R20.1 U5.8 U6.SCK
SCL2: JP19.1 JP21.14 JP21.D1 R30.1 U8.8 U9.SCK
SCL3: JP26.1 JP28.14 JP28.D1 R40.1 U11.8 U12.SCK
SCL4: JP33.1 JP35.14 JP35.D1 R50.1 U14.8 U15.SCK
SCL5: JP40.1 JP42.14 JP42.D1 R60.1 U17.8 U18.SCK
SDA: JP1.2 JP9.13 JP9.D0 R2.1 U2.DATA U3.7
SDA1: JP12.2 JP14.13 JP14.D0 R19.1 U5.7 U6.DATA
SDA2: JP19.2 JP21.13 JP21.D0 R29.1 U8.7 U9.DATA
SDA3: JP26.2 JP28.13 JP28.D0 R39.1 U11.7 U12.DATA
SDA4: JP33.2 JP35.13 JP35.D0 R49.1 U14.7 U15.DATA
SDA5: JP40.2 JP42.13 JP42.D0 R59.1 U17.7 U18.DATA
SOIL_MOIST: JP3.2 JP9.11 JP9.A1
SOIL_MOIST3: JP11.2 JP14.11 JP14.A1
SOIL_MOIST4: JP18.2 JP21.11 JP21.A1
SOIL_MOIST5: JP25.2 JP28.11 JP28.A1
SOIL_MOIST6: JP32.2 JP35.11 JP35.A1
SOIL_MOIST7: JP39.2 JP42.11 JP42.A1
SOIL_MOIST_POWER: JP3.3 JP9.18 JP9.D5
SOIL_MOIST_POWER1: JP11.3 JP14.18 JP14.D5
SOIL_MOIST_POWER2: JP18.3 JP21.18 JP21.D5
SOIL_MOIST_POWER3: JP25.3 JP28.18 JP28.D5
SOIL_MOIST_POWER4: JP32.3 JP35.18 JP35.D5
SOIL_MOIST_POWER5: JP39.3 JP42.18 JP42.D5
SOIL_TEMP: JP2.2 JP9.17 JP9.D4 R1.2
SOIL_TEMP2: JP10.2 JP14.17 JP14.D4 R18.2
SOIL_TEMP3: JP17.2 JP21.17 JP21.D4 R28.2
SOIL_TEMP4: JP24.2 JP28.17 JP28.D4 R38.2
SOIL_TEMP5: JP31.2 JP35.17 JP35.D4 R48.2
SOIL_TEMP6: JP38.2 JP42.17 JP42.D4 R58.2
TXO: JP4.1 JP9.3 JP9.TX
TXO1: JP13.1 JP14.3 JP14.TX
TXO2: JP20.1 JP21.3 JP21.TX
TXO3: JP27.1 JP28.3 JP28.TX
TXO4: JP34.1 JP35.3 JP35.TX
TXO5: JP41.1 JP42.3 JP42.TX
VREG: C13.A SJ2.3 U1.1 U1.3
VREG1: C15.A SJ5.3 U4.1 U4.3
VREG2: C23.A SJ8.3 U7.1 U7.3
VREG3: C31.A SJ11.3 U10.1 U10.3
VREG4: C39.A SJ14.3 U13.1 U13.3
VREG5: C47.A SJ17.3 U16.1 U16.3
WDIR: D7.A D8.C JP9.12 JP9.A0 R13.1 R17.2
WDIR1: D3.A D4.C JP14.12 JP14.A0 R4.2 R7.1
WDIR2: D15.A D16.C JP21.12 JP21.A0 R21.2 R24.1
WDIR3: D21.A D22.C JP28.12 JP28.A0 R31.2 R34.1
WDIR4: D27.A D28.C JP35.12 JP35.A0 R41.2 R44.1
WDIR5: D33.A D34.C JP42.12 JP42.A0 R51.2 R54.1
WSPEED: D9.A D10.C JP9.16 JP9.D3 R14.1
WSPEED1: D1.A D2.C JP14.16 JP14.D3 R5.1
WSPEED2: D13.A D14.C JP21.16 JP21.D3 R22.1
WSPEED3: D19.A D20.C JP28.16 JP28.D3 R32.1
WSPEED4: D25.A D26.C JP35.16 JP35.D3 R42.1
WSPEED5: D31.A D32.C JP42.16 JP42.D3 R52.1